# EAGLE board EEPROM-smt2 (EAGLE 7.6.0)
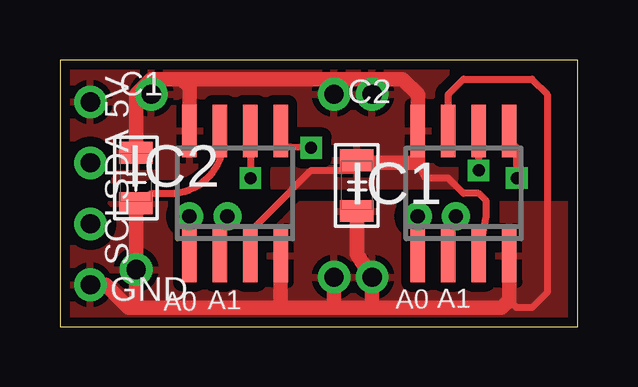
[diagram p0: board, top side]
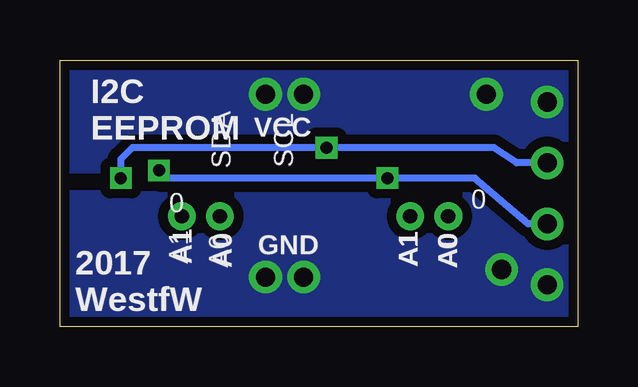
[diagram p1: board, bottom side, seen from below]

Size 21.59 x 11.11 mm. Coordinates in mm from the lower left corner, seen from the top.
Outline: 0,0 21.59,0 21.59,11.11 0,11.11 0,0
Copper layers (1*16): Top 0.035mm / dielectric 1.5mm / Bottom 0.035mm
Design rules "default *": minimum track width 10mil, minimum drill 24mil, track to track 8mil, track to pad 8mil, pad to pad 8mil, via to via 8mil, smd to smd 8mil, copper to edge 10mil, drill to drill 8mil, minimum pad ring 11mil, minimum via ring 8mil, stop-mask expansion 4mil, vias tented up to drill 0.75mm, thermal gap 10mil
Net classes: 0 default: width 0.2 mm, drill 0.5 mm, clearance 0.25 mm; 1 power: width 0.4 mm, drill 0.6 mm, clearance 0.25 mm

## Footprints (pad centres in the part's own frame; a part is rotated, then mirrored left to right if it is on the bottom)
VIA8 = drill 0.8: P$1 0,0
VIA6 = drill 0.6: P$1 0,0
C0805 = smd 0.914 x 1.397: 1 -1.053,0; 2 1.053,0
SO-08 = smd 0.6 x 2.2: 1 -1.905,-2.6; 2 -0.635,-2.6; 3 0.635,-2.6; 4 1.905,-2.6; 5 1.905,2.6; 6 0.635,2.6; 7 -0.635,2.6; 8 -1.905,2.6

## Placement (x,y rotation side)
5V  WIRE-VIA8  [VIA8]  1.27,9.37 180 top
A0  WIRE-R6  [VIA6]  14.92,4.6 0 top
A0_  WIRE-R6  [VIA6]  5.4,4.6 0 top
A1  WIRE-R6  [VIA6]  16.51,4.6 0 top
A1_  WIRE-R6  [VIA6]  6.98,4.6 0 top
C1  [C0805]  3.18,6.19 270 top
C2  [C0805]  12.38,5.87 270 top
GND  WIRE-VIA8  [VIA8]  1.27,1.75 180 top
IC1  24FC1025  [SO-08]  16.83,5.56 0 top
IC2  24FC1025  [SO-08]  7.3,5.56 0 top
SCL  WIRE-VIA8  [VIA8]  1.27,4.29 180 top
SDA  WIRE-VIA8  [VIA8]  1.27,6.83 180 top
W1  WIRE-VIA8  [VIA8]  13.02,2.06 0 top
W5  WIRE-VIA8  [VIA8]  3.18,2.38 0 top
W6  WIRE-VIA8  [VIA8]  11.43,2.06 0 top
W9  WIRE-VIA8  [VIA8]  11.43,9.68 0 top
W10  WIRE-VIA8  [VIA8]  3.81,9.68 0 top
W11  WIRE-VIA8  [VIA8]  13.02,9.68 0 top

## Library data of the parts
5V A0 A0_ A1 A1_ GND SCL SDA W1 W5 W6 W9-W11 = mylib4
C1 C2 = my-rcl
IC1 IC2 = microchip; MF: MICROCHIP; MPN: 24LC128-I/SNG; OC_FARNELL: 9757937; OC_NEWARK: 30H1511

## Nets
GND [power]: C1.2 C2.2 GND.P$1 IC1.4 IC1.7 IC2.4 IC2.7 W1.P$1 W5.P$1 W6.P$1
N$1: A1.P$1 IC1.2
N$2: A0.P$1 IC1.1
N$3: IC1.6 IC2.6 SCL.P$1
N$4: IC1.5 IC2.5 SDA.P$1
N$5: A1_.P$1 IC2.2
N$6: A0_.P$1 IC2.1
VCC [power]: 5V.P$1 C1.1 C2.1 IC1.3 IC1.8 IC2.3 IC2.8 W9.P$1 W10.P$1 W11.P$1

## Tracks (layer width: path | path; a pad name or v marks a point on that pad's centre or on a via)
GND
  Top 0.3: IC1.7 16.19,9.68 16.83,10.32 19.69,10.32 20.32,9.68 20.32,1.43 19.69,0.79 19.05,0.79 18.73,1.11 | C1.2 3.81,5.56 4.6,5.56 arc69 6.67,6.99 arc41 IC2.7
  Top 0.6: GND.P$1 1.9,1.75 2.86,0.79 3.18,0.79 | 3.18,0.79 9.21,0.79 | 9.21,0.79 11.43,0.79 | 11.43,0.79 13.02,0.79 | 13.02,0.79 18.42,0.79 18.73,1.11 IC1.4 | IC2.4 9.21,0.79 | C1.2 W5.P$1 3.18,0.79 | W6.P$1 11.43,0.79 | 13.02,0.79 W1.P$1 12.38,3.02 C2.2
  pour Top (isolate 0.4): -0.64,5.08 -0.64,-0.79 23.18,-0.79 23.18,5.08
  pour Bottom (isolate 0.4, no thermals): -0.64,5.56 -0.64,-0.48 22.54,-0.48 22.54,5.56
N$1
  Top 0.3: IC1.2 16.19,4.29 A1.P$1
N$2
  Top 0.3: IC1.1 14.92,4.92 A0.P$1
N$3  (via drill 0.5)
  Top 0.3: v17.46,6.51 IC1.6 | IC2.6 v7.94,6.19
  Bottom 0.3: SCL.P$1 2.06,4.29 4.29,6.19 v7.94,6.19 | v7.94,6.19 8.25,6.19 | 8.25,6.19 12.7,6.19 13.97,6.19 17.46,6.19 v17.46,6.51 | v7.94,6.19 8.25,6.19
N$4  (via drill 0.5)
  Top 0.3: IC2.5 9.27,7.52 v10.48,7.46 | v19.05,6.19 19.05,7.46 18.73,7.78 IC1.5
  Bottom 0.3: SDA.P$1 2.54,6.83 3.49,7.46 v10.48,7.46 | v10.48,7.46 11.75,7.46 | v10.48,7.46 11.75,7.46 | 11.75,7.46 17.46,7.46 18.57,7.46 19.05,6.99 v19.05,6.19
N$5
  Top 0.3: IC2.2 6.67,4.29 A1_.P$1
N$6
  Top 0.3: IC2.1 A0_.P$1
VCC
  Top 0.3: IC2.3 7.94,3.97 8.89,4.92 10.48,6.51 12.28,6.51 C2.1 | IC1.3 17.78,4.6 17.78,5.24 17.46,5.56 16.83,5.56 16.19,6.19 15.24,6.19 14.92,6.83
  Top 0.6: C1.1 3.18,9.68 3.81,10.32 5.08,10.32 | 5.08,10.32 12.38,10.32 14.29,10.32 14.92,9.68 IC1.8 14.92,6.83 14.6,6.83 12.48,6.83 C2.1 | IC2.8 5.4,10 5.08,10.32
  pour Top (isolate 0.4): -0.64,11.91 -0.64,5.87 24.13,5.87 24.13,11.91
  pour Bottom (isolate 0.4, no thermals): -0.64,11.59 -0.64,6.51 22.23,6.51 22.23,11.59

## Text on the board
tPlace: A0 | A1 | A0 | A1
bPlace: SCL | SDA | 0 | 0 | A0 | A1 | A0 | A1
_tplace: 5V | GND | A0 | A1 | A0 | A1 | 24FC1025
_bplace: VCC | I2C / EEPROM | A0 | A1 | GND | A0 | A1 | 2017 / WestfW